# EAGLE board ATM8_mainboard (EAGLE 6.4)
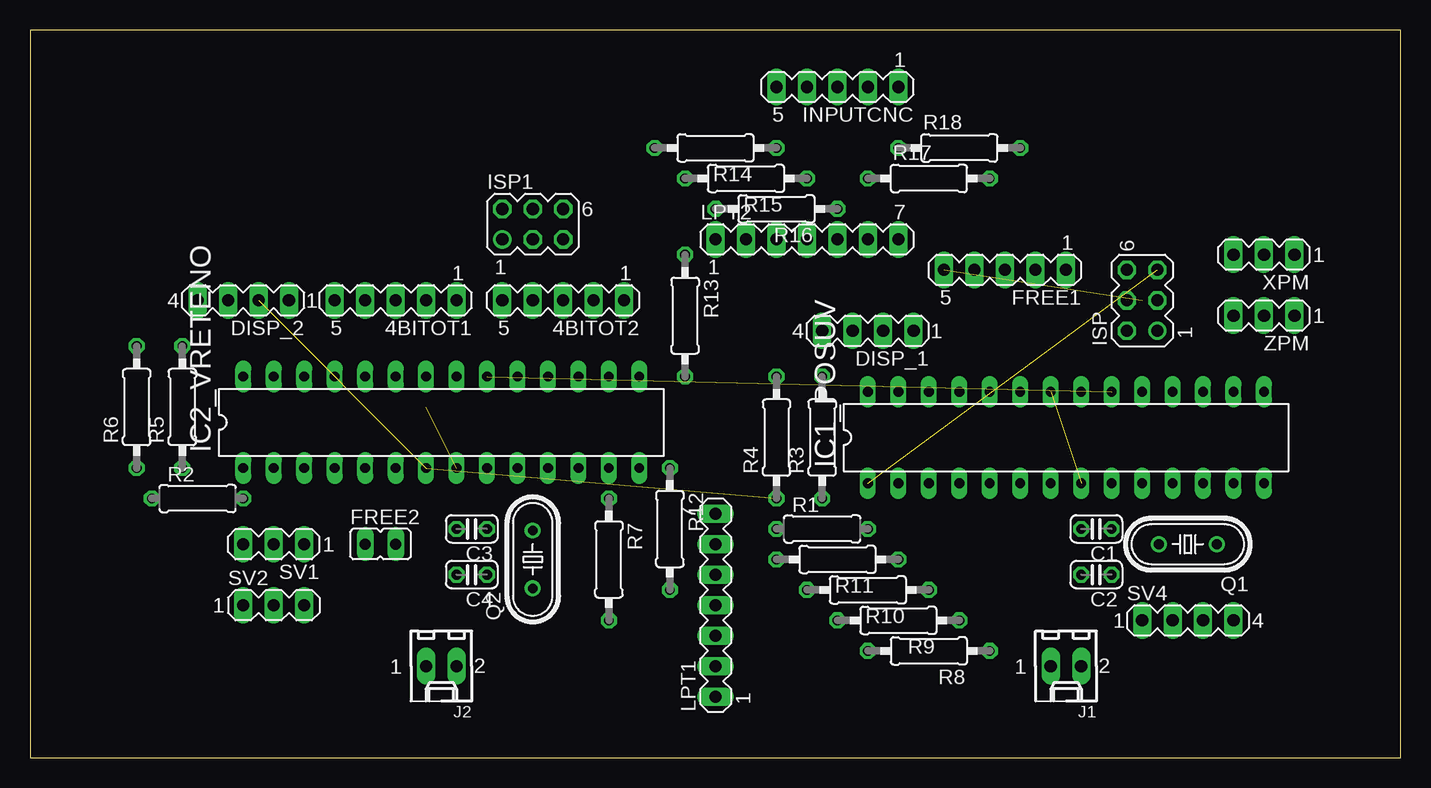
[diagram p0: board, top side]
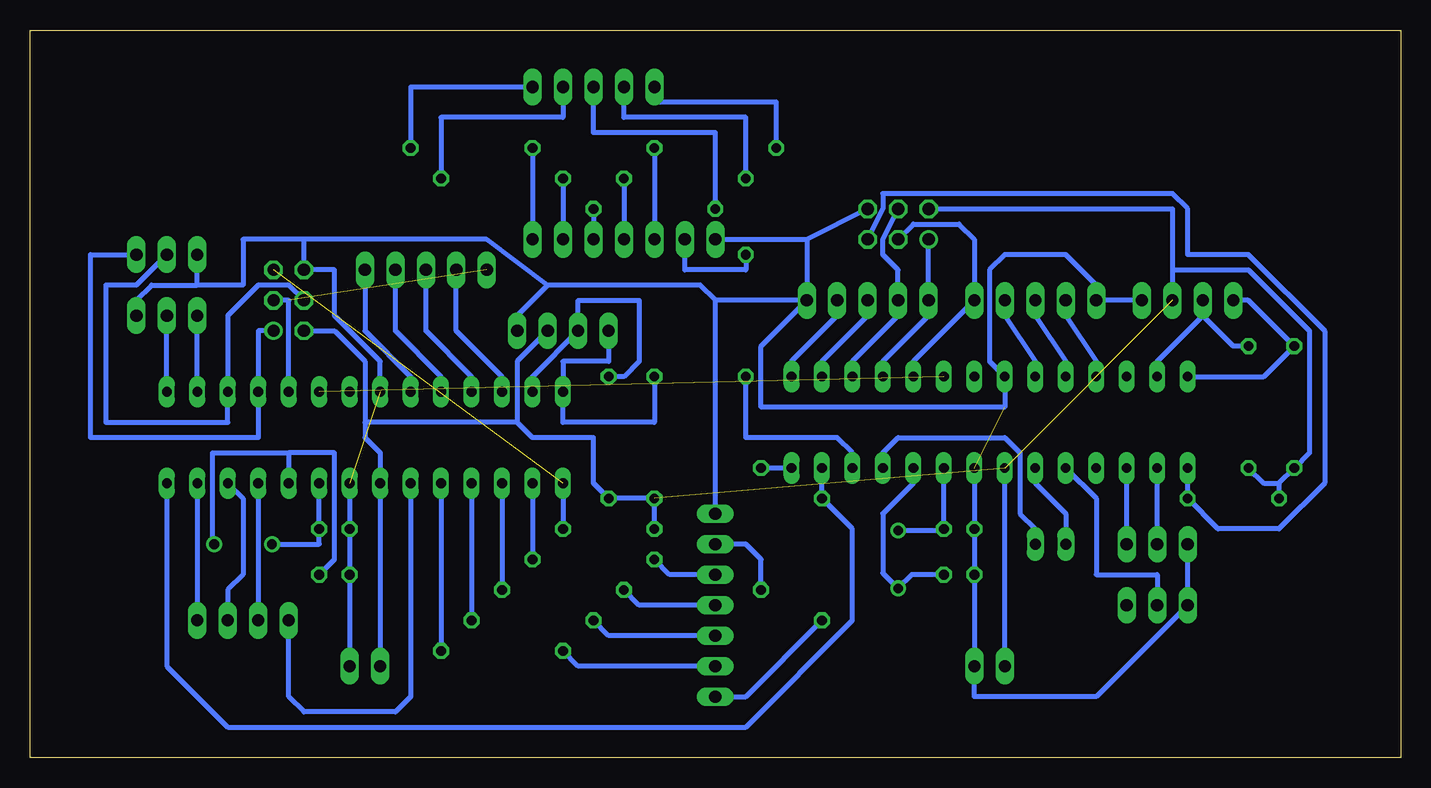
[diagram p1: board, bottom side, seen from below]

Size 114.28 x 60.63 mm. Coordinates in mm from the lower left corner, seen from the top.
Outline: 0,0 114.28,0 114.28,60.63 0,60.63 0,0
Copper layers (1*16): Top 0.035mm / dielectric 1.5mm / Bottom 0.035mm
Design rules "default": minimum track width 10mil, minimum drill 24mil, track to track 8mil, track to pad 8mil, pad to pad 8mil, via to via 8mil, smd to smd 8mil, copper to edge 40mil, drill to drill 8mil, minimum pad ring 10mil, minimum via ring 8mil, stop-mask expansion 4mil, vias tented up to drill 0mil, thermal gap 10mil

## Footprints (pad centres in the part's own frame; a part is rotated, then mirrored left to right if it is on the bottom)
MA05-1 = drill 1.016 long: 1 -5.08,0; 2 -2.54,0; 3 0,0; 4 2.54,0; 5 5.08,0
C025-024X044 = drill 0.813 octagon: 1 -1.27,0; 2 1.27,0
MA04-1 = drill 1.016 long: 1 -3.81,0; 2 -1.27,0; 3 1.27,0; 4 3.81,0
JP1 = drill 0.914 long: 1 0,-1.27; 2 0,1.27
DIL28-3 = drill 0.813 long: 1 -16.51,-3.81; 2 -13.97,-3.81; 3 -11.43,-3.81; 4 -8.89,-3.81; 5 -6.35,-3.81; 6 -3.81,-3.81; 7 -1.27,-3.81; 8 1.27,-3.81; 9 3.81,-3.81; 10 6.35,-3.81; 11 8.89,-3.81; 12 11.43,-3.81; 13 13.97,-3.81; 14 16.51,-3.81; 15 16.51,3.81; 16 13.97,3.81; 17 11.43,3.81; 18 8.89,3.81; 19 6.35,3.81; 20 3.81,3.81; 21 1.27,3.81; 22 -1.27,3.81; 23 -3.81,3.81; 24 -6.35,3.81; 25 -8.89,3.81; 26 -11.43,3.81; 27 -13.97,3.81; 28 -16.51,3.81
MA03-2 = drill 1.016: 1 -2.54,-1.27 | drill 1.016 octagon: 2 -2.54,1.27; 3 0,-1.27; 4 0,1.27; 5 2.54,-1.27; 6 2.54,1.27
6410-02 = drill 1.016 long: 1 1.27,0; 2 -1.27,0
MA07-1 = drill 1.016 long: 1 -7.62,0; 2 -5.08,0; 3 -2.54,0; 4 0,0; 5 2.54,0; 6 5.08,0; 7 7.62,0
HC49/S = drill 0.813: 1 -2.413,0; 2 2.413,0
0207/7 = drill 0.813 octagon: 1 -3.81,0; 2 3.81,0
0207/10 = drill 0.813 octagon: 1 -5.08,0; 2 5.08,0
MA03-1 = drill 1.016 long: 1 -2.54,0; 2 0,0; 3 2.54,0

## Placement (x,y rotation side)
4BITOT1  FEMALE  [MA05-1]  30.48,38.1 180 top
4BITOT2  FEMALE  [MA05-1]  44.45,38.1 180 top
C1  22p  [C025-024X044]  88.9,19.05 180 top
C2  22p  [C025-024X044]  88.9,15.24 180 top
C3  22p  [C025-024X044]  36.83,19.05 180 top
C4  22p  [C025-024X044]  36.83,15.24 180 top
DISP_1  MALE  [MA04-1]  69.85,35.56 180 top
DISP_2  MALE  [MA04-1]  17.78,38.1 180 top
FREE1  FEMALE  [MA05-1]  81.28,40.64 180 top
FREE2  MALE  [JP1]  29.21,17.78 270 top
IC1_POSUV  MEGA8-P  [DIL28-3]  86.36,26.67 0 top
IC2_VRETENO  MEGA8-P  [DIL28-3]  34.29,27.94 0 top
INPUTCNC  FEMALE  [MA05-1]  67.31,55.88 180 top
ISP  MALE  [MA03-2]  92.71,38.1 90 top
ISP1  MALE  [MA03-2]  41.91,44.45 0 top
J1  22-27-2021-02  [6410-02]  86.36,7.62 180 top
J2  22-27-2021-02  [6410-02]  34.29,7.62 180 top
LPT1  FEMALE  [MA07-1]  57.15,12.7 90 top
LPT2  FEMALE  [MA07-1]  64.77,43.18 0 top
Q1  [HC49/S]  96.52,17.78 180 top
Q2  [HC49/S]  41.91,16.51 90 top
R1  10k  [0207/7]  66.04,19.05 0 top
R2  10k  [0207/7]  13.97,21.59 0 top
R3  4.7k  [0207/10]  66.04,26.67 90 top
R4  4.7k  [0207/10]  62.23,26.67 90 top
R5  4.7k  [0207/10]  12.7,29.21 90 top
R6  4.7k  [0207/10]  8.89,29.21 90 top
R7  270R  [0207/10]  48.26,16.51 270 top
R8  270R  [0207/10]  74.93,8.89 180 top
R9  270R  [0207/10]  72.39,11.43 180 top
R10  [0207/10]  69.85,13.97 180 top
R11  270R  [0207/10]  67.31,16.51 180 top
R12  270R  [0207/10]  53.34,19.05 270 top
R13  270R  [0207/10]  54.61,36.83 270 top
R14  270R  [0207/10]  57.15,50.8 180 top
R15  270R  [0207/10]  59.69,48.26 180 top
R16  270R  [0207/10]  62.23,45.72 180 top
R17  270R  [0207/10]  74.93,48.26 0 top
R18  270R  [0207/10]  77.47,50.8 0 top
SV1  FEMALE  [MA03-1]  20.32,17.78 180 top
SV2  FEMALE  [MA03-1]  20.32,12.7 0 top
SV4  FEMALE  [MA04-1]  96.52,11.43 0 top
XPM  FEMALE  [MA03-1]  102.87,41.91 180 top
ZPM  FEMALE  [MA03-1]  102.87,36.83 180 top

## Library data of the parts
4BITOT1 4BITOT2 DISP_1 DISP_2 FREE1 INPUTCNC ISP ISP1 LPT1 LPT2 SV1 SV2 SV4 XPM ZPM = con-lstb; OC_FARNELL: unknown; OC_NEWARK: unknown
C1-C4 R1-R18 = resistor
FREE2 = jumper
IC1_POSUV IC2_VRETENO = atmel; OC_FARNELL: unknown; OC_NEWARK: unknown
J1 J2 = con-molex; OC_FARNELL: unknown; OC_NEWARK: unknown
Q1 Q2 = crystal; OC_FARNELL: 1667008; OC_NEWARK: unknown

## Nets
+Z: IC1_POSUV.16 ZPM.3
-Z: IC1_POSUV.15 ZPM.2
AVCC: IC1_POSUV.20 IC2_VRETENO.20
DIRVRET: IC2_VRETENO.12 R13.2
DIRX: IC1_POSUV.2 R11.1
DIRZ: IC1_POSUV.4 R9.1
DORX: INPUTCNC.4 R15.2
DORZ: INPUTCNC.5 R14.2
ENABLE: IC1_POSUV.14 IC2_VRETENO.13 R7.1
G: INPUTCNC.1 R18.2
GND: 4BITOT1.5 4BITOT2.1 C1.2 C2.2 C3.2 C4.2 DISP_1.1 DISP_2.1 IC1_POSUV.8 IC1_POSUV.22 IC2_VRETENO.8 IC2_VRETENO.22 ISP1.6 ISP.6 J1.2 J2.2 LPT1.7 LPT2.1 SV1.3 SV2.1 XPM.3 ZPM.1
I: INPUTCNC.3 R16.2
M01: IC2_VRETENO.2 SV1.2
M02: IC2_VRETENO.3 SV1.1
M03: IC2_VRETENO.4
MISO1: IC1_POSUV.18 ISP.1 XPM.1
MISO2: 4BITOT2.5 IC2_VRETENO.18 ISP1.1
MO3: SV2.3
MOSI1: IC1_POSUV.17 ISP.4 XPM.2
MOSI2: 4BITOT2.4 IC2_VRETENO.17 ISP1.4
N$1: LPT1.6 R12.2
N$2: LPT1.5 R11.2
N$3: LPT1.4 R10.2
N$4: LPT1.3 R9.2
N$5: LPT1.2 R8.2
N$6: LPT1.1 R7.2
N$7: LPT2.7 R18.1
N$8: LPT2.6 R17.1
N$9: LPT2.5 R16.1
N$10: LPT2.4 R15.1
N$11: LPT2.3 R14.1
N$12: LPT2.2 R13.1
PB3: C3.1 IC2_VRETENO.9 Q2.2
PB4: C4.1 IC2_VRETENO.10 Q2.1
PB6: C1.1 IC1_POSUV.9 Q1.2
PB7: C2.1 IC1_POSUV.10 Q1.1
PB12: 4BITOT2.2 IC2_VRETENO.15
PB22: 4BITOT2.3 IC2_VRETENO.16
PC01: FREE1.1 IC1_POSUV.23
PC02: 4BITOT1.2 IC2_VRETENO.23
PC11: FREE1.2 IC1_POSUV.24
PC12: 4BITOT1.3 IC2_VRETENO.24
PC21: FREE1.3 IC1_POSUV.25
PC22: 4BITOT1.4 IC2_VRETENO.25
PC31: FREE1.4 IC1_POSUV.26
PC32: IC2_VRETENO.26
PD41: IC1_POSUV.6 SV4.1
PD42: FREE2.1 IC2_VRETENO.6
PD51: IC1_POSUV.11 SV4.2
PD52: FREE2.2 IC2_VRETENO.11
PD61: IC1_POSUV.12 SV4.3
PD71: IC1_POSUV.13 SV4.4
PWMV: IC2_VRETENO.14 R12.1
RESET1: IC1_POSUV.1 ISP.5 R1.2
RESET2: IC2_VRETENO.1 ISP1.5 R2.2
SCK1: FREE1.5 IC1_POSUV.19 ISP.3
SCK2: 4BITOT1.1 IC2_VRETENO.19 ISP1.3
SCL1: DISP_1.4 IC1_POSUV.28 R4.2
SCL2: DISP_2.4 IC2_VRETENO.28 R6.2
SDA1: DISP_1.3 IC1_POSUV.27 R3.2
SDA2: DISP_2.3 IC2_VRETENO.27 R5.2
STEPX: IC1_POSUV.3 R10.1
STEPZ: IC1_POSUV.5 R8.1
V: INPUTCNC.2 R17.2
VCC: DISP_1.2 DISP_2.2 IC1_POSUV.7 IC2_VRETENO.7 ISP1.2 ISP.2 J1.1 J2.1 R1.1 R2.1 R3.1 R4.1 R5.1 R6.1
ZMM: IC2_VRETENO.5 SV2.2

## Tracks (layer width: path | path; a pad name or v marks a point on that pad's centre or on a via)
+Z
  Bottom 0.406: IC1_POSUV.16 ZPM.3
-Z
  Bottom 0.406: IC1_POSUV.15 ZPM.2
AVCC  (1 unrouted)
DIRVRET
  Bottom 0.406: IC2_VRETENO.12 45.72,25.4 46.99,26.67 54.61,26.67 R13.2
DIRX
  Bottom 0.406: IC1_POSUV.2 R11.1
DIRZ
  Bottom 0.406: IC1_POSUV.4 R9.1
DORX
  Bottom 0.406: R15.2 54.61,53.34 64.77,53.34 INPUTCNC.4
DORZ
  Bottom 0.406: R14.2 52.07,54.61 62.23,54.61 INPUTCNC.5
ENABLE
  Bottom 0.406: IC2_VRETENO.13 R7.1 45.72,19.05 45.72,11.43 54.61,2.54 97.79,2.54 102.87,7.62 IC1_POSUV.14
G
  Bottom 0.406: INPUTCNC.1 82.55,55.88 R18.2
GND  (2 unrouted)
  Bottom 0.406: ZPM.1 105.41,38.1 104.14,39.37 100.33,39.37 | 100.33,39.37 XPM.3 | 91.44,43.18 ISP.6 88.9,40.64 88.9,36.83 85.09,33.02 IC1_POSUV.22 | 91.44,43.18 96.52,43.18 96.52,39.37 100.33,39.37 | IC1_POSUV.8 C1.2 C2.2 J1.2 | 4BITOT2.1 57.15,38.1 | DISP_2.1 4BITOT1.5 25.4,39.37 27.94,41.91 33.02,41.91 34.29,40.64 34.29,33.02 IC2_VRETENO.22 33.02,29.21 53.34,29.21 53.34,34.29 4BITOT2.1 | IC2_VRETENO.8 C3.2 C4.2 J2.2 35.56,5.08 25.4,5.08 SV2.1 SV1.3 | ISP1.6 49.53,43.18 | 49.53,43.18 4BITOT2.1 | LPT1.7 57.15,38.1 | LPT2.1 49.53,43.18 | 57.15,38.1 58.42,39.37 71.12,39.37 | 71.12,39.37 76.2,43.18 91.44,43.18 | DISP_1.1 73.66,36.83 71.12,39.37
I
  Bottom 0.406: R16.2 57.15,52.07 67.31,52.07 INPUTCNC.3
M01
  Bottom 0.406: SV1.2 IC2_VRETENO.2
M02
  Bottom 0.406: SV1.1 IC2_VRETENO.3
MISO1
  Bottom 0.406: XPM.1 109.22,41.91 109.22,26.67 95.25,26.67 IC1_POSUV.18 95.25,35.56 ISP.1
MISO2
  Bottom 0.406: IC2_VRETENO.18 43.18,33.02 39.37,36.83 4BITOT2.5 ISP1.1
MOSI1
  Bottom 0.406: ISP.4 92.71,39.37 95.25,39.37 97.79,36.83 IC1_POSUV.17 97.79,27.94 107.95,27.94 107.95,39.37 105.41,39.37 XPM.2
MOSI2
  Bottom 0.406: IC2_VRETENO.17 45.72,33.02 41.91,36.83 4BITOT2.4 41.91,40.64 43.18,41.91 43.18,43.18 ISP1.4
N$1
  Bottom 0.406: R12.2 53.34,16.51 54.61,17.78 LPT1.6
N$2
  Bottom 0.406: LPT1.5 60.96,15.24 R11.2
N$3
  Bottom 0.406: LPT1.4 63.5,12.7 R10.2
N$4
  Bottom 0.406: LPT1.3 66.04,10.16 R9.2
N$5
  Bottom 0.406: LPT1.2 68.58,7.62 R8.2
N$6
  Bottom 0.406: LPT1.1 54.61,5.08 R7.2
N$7
  Bottom 0.406: R18.1 LPT2.7
N$8
  Bottom 0.406: R17.1 LPT2.6
N$9
  Bottom 0.406: R16.1 LPT2.5
N$10
  Bottom 0.406: R15.1 LPT2.4
N$11
  Bottom 0.406: R14.1 LPT2.3
N$12
  Bottom 0.406: R13.1 54.61,40.64 59.69,40.64 LPT2.2
PB3
  Bottom 0.406: IC2_VRETENO.9 C3.1 38.23,18.92 Q2.2
PB4
  Bottom 0.406: C4.1 40.77,15.24 Q2.1 43.18,15.37 43.18,20.32 40.64,22.86 IC2_VRETENO.10
PB6
  Bottom 0.406: Q1.2 90.17,17.78 C1.1 IC1_POSUV.9
PB7
  Bottom 0.406: Q1.1 99.06,17.91 99.06,25.4 92.71,25.4 | 92.71,25.4 IC1_POSUV.10 | C2.1 88.9,16.51 88.9,25.4 92.71,25.4
PB12
  Bottom 0.406: IC2_VRETENO.15 50.8,33.02 46.99,36.83 4BITOT2.2
PB22
  Bottom 0.406: 4BITOT2.3 44.45,36.83 48.26,33.02 IC2_VRETENO.16
PC01
  Bottom 0.406: FREE1.1 86.36,35.56 82.55,31.75 IC1_POSUV.23
PC02
  Bottom 0.406: 4BITOT1.2 33.02,36.83 30.48,33.02 IC2_VRETENO.23
PC11
  Bottom 0.406: IC1_POSUV.24 80.01,31.75 83.82,35.56 FREE1.2
PC12
  Bottom 0.406: 4BITOT1.3 30.48,36.83 27.94,33.02 IC2_VRETENO.24
PC21
  Bottom 0.406: IC1_POSUV.25 77.47,31.75 81.28,35.56 FREE1.3
PC22
  Bottom 0.406: 4BITOT1.4 27.94,36.83 25.4,33.02 IC2_VRETENO.25
PC31
  Bottom 0.406: IC1_POSUV.26 74.93,31.75 78.74,35.56 FREE1.4
PD41
  Bottom 0.406: IC1_POSUV.6 82.55,5.08 83.82,3.81 91.44,3.81 92.71,5.08 SV4.1
PD42
  Bottom 0.406: IC2_VRETENO.6 30.48,22.86 27.94,20.32 FREE2.1
PD51
  Bottom 0.406: IC1_POSUV.11 SV4.2
PD52
  Bottom 0.406: IC2_VRETENO.11 43.18,25.4 41.91,26.67 33.02,26.67 31.75,25.4 31.75,20.32 30.48,19.05 FREE2.2
PD61
  Bottom 0.406: IC1_POSUV.12 96.52,21.59 96.52,15.24 97.79,13.97 SV4.3
PD71
  Bottom 0.406: IC1_POSUV.13 SV4.4
PWMV
  Bottom 0.406: IC2_VRETENO.14 R12.1
RESET1  (1 unrouted)
  Bottom 0.406: IC1_POSUV.1 R1.2
RESET2
  Bottom 0.406: IC2_VRETENO.1 R2.2 15.24,19.05 10.16,19.05 6.35,22.86 6.35,35.56 12.7,41.91 17.78,41.91 17.78,45.72 19.05,46.99 43.18,46.99 43.18,45.72 ISP1.5
SCK1  (1 unrouted)
  Bottom 0.406: IC1_POSUV.19 92.71,38.1 ISP.3
SCK2
  Bottom 0.406: ISP1.3 40.64,44.45 36.83,44.45 35.56,43.18 4BITOT1.1 40.64,33.02 IC2_VRETENO.19
SCL1
  Bottom 0.406: DISP_1.4 66.04,33.02 69.85,33.02 IC1_POSUV.28 69.85,27.94 62.23,27.94 R4.2
SCL2
  Bottom 0.406: DISP_2.4 12.7,38.1 R6.2 11.43,31.75 IC2_VRETENO.28
SDA1
  Bottom 0.406: R3.2 64.77,31.75 63.5,33.02 63.5,38.1 68.58,38.1 DISP_1.3 72.39,31.75 IC1_POSUV.27
SDA2
  Bottom 0.406: R5.2 13.97,34.29 16.51,36.83 | 16.51,36.83 DISP_2.3 | IC2_VRETENO.27 20.32,33.02 16.51,36.83
STEPX
  Bottom 0.406: IC1_POSUV.3 R10.1
STEPZ
  Bottom 0.406: IC1_POSUV.5 R8.1
V
  Bottom 0.406: INPUTCNC.2 69.85,53.34 80.01,53.34 R17.2
VCC  (2 unrouted)
  Bottom 0.406: ISP.2 88.9,35.56 86.36,33.02 86.36,27.94 | 86.36,27.94 86.36,26.67 85.09,25.4 IC1_POSUV.7 J1.1 | DISP_1.2 73.66,33.02 73.66,27.94 | 73.66,27.94 86.36,27.94 | R1.1 R4.1 R3.1 67.31,22.86 67.31,26.67 72.39,26.67 73.66,27.94 | 10.16,22.86 R6.1 7.62,25.4 7.62,35.56 12.7,40.64 19.05,40.64 | 10.16,22.86 R2.1 | R5.1 11.43,22.86 10.16,22.86 | J2.1 IC2_VRETENO.7 | ISP1.2 19.05,45.72 19.05,40.64 | 19.05,40.64 DISP_2.2
ZMM
  Bottom 0.406: IC2_VRETENO.5 25.4,21.59 25.4,15.24 20.32,15.24 SV2.2